# EAGLE board mpg-200-prototype_v4-duplicated-tmp (EAGLE 7.2.0)
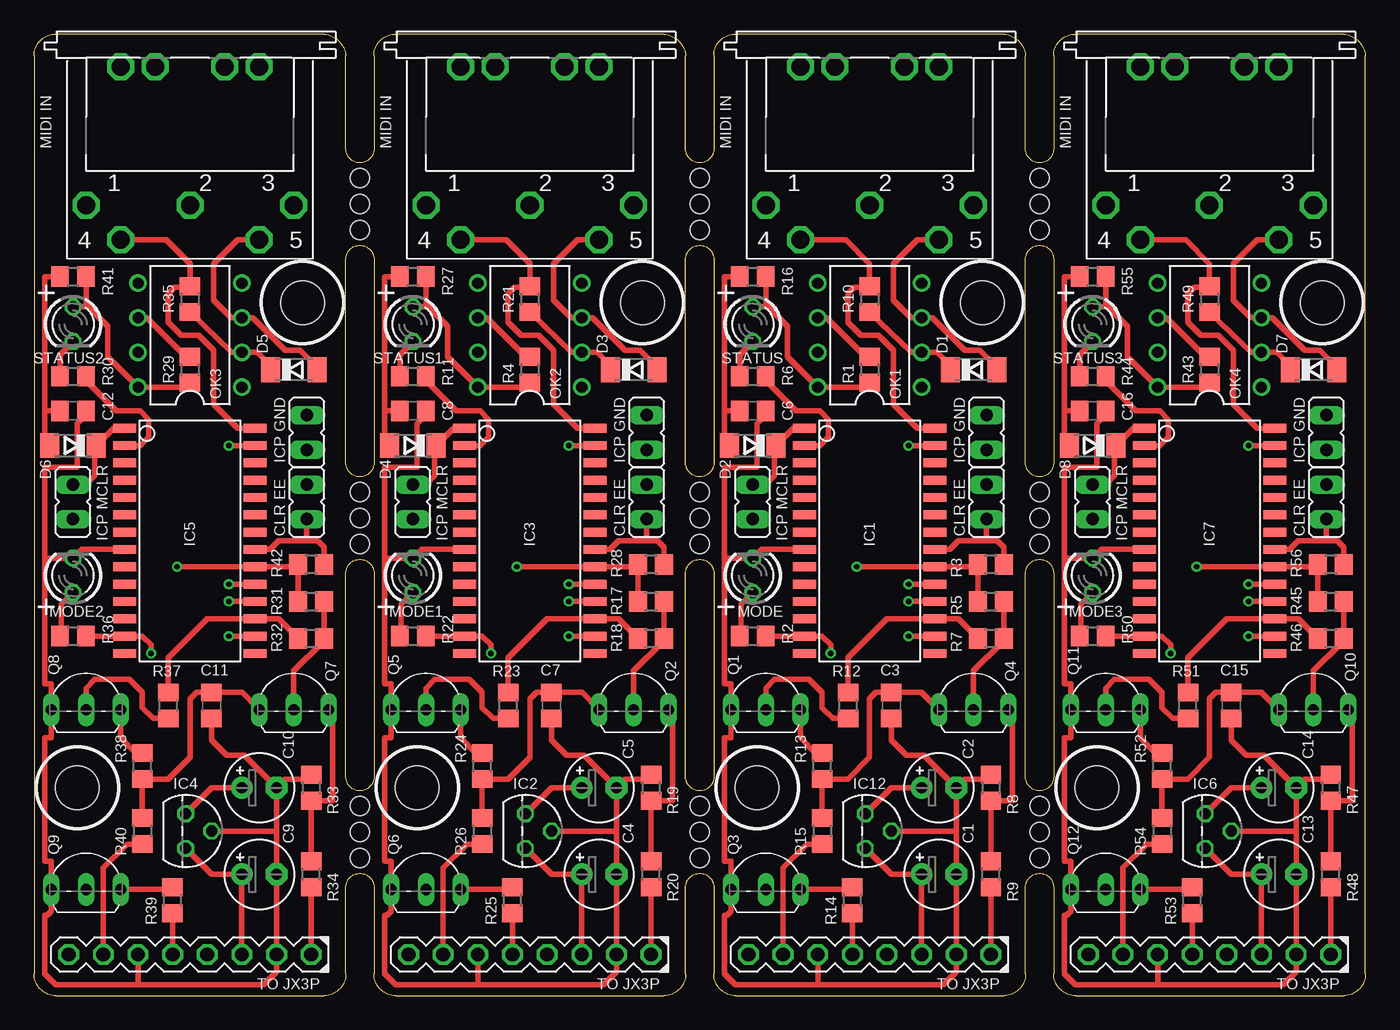
[diagram p0: board, top side]
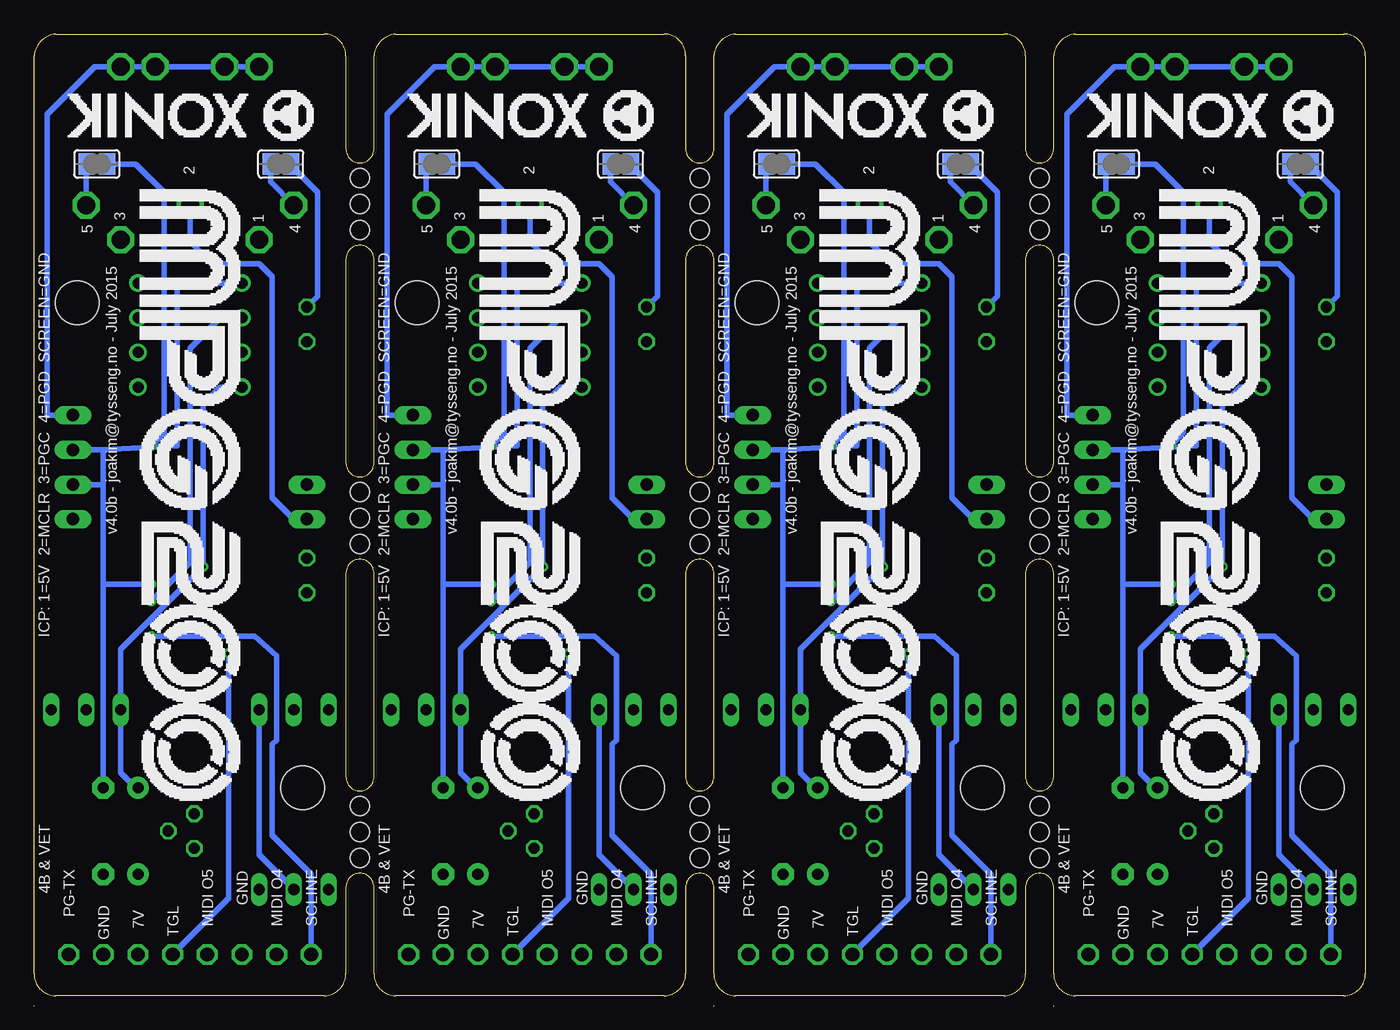
[diagram p1: board, bottom side, seen from below]

Size 97.63 x 70.48 mm. Coordinates in mm from the lower left corner, seen from the top.
Outline: 72.71,1.59 72.71,7.94 arc-180 74.77,7.94 74.77,1.59 arc90 76.36,0 96.04,0 arc90 97.63,1.59 97.63,68.9 arc80 96.04,70.48 76.36,70.48 arc90 74.77,68.9 74.77,62.07 arc-180 72.71,62.07 72.71,68.9 arc80 71.12,70.48 51.44,70.48 arc90 49.85,68.9 49.85,62.07 arc-180 47.78,62.07 47.78,68.9 arc80 46.2,70.48 26.51,70.48 arc90 24.92,68.9 24.92,62.07 arc-180 22.86,62.07 22.86,68.9 arc80 21.27,70.48 1.59,70.48 arc90 0,68.9 0,1.59 arc90 1.59,0 21.27,0 arc90 22.86,1.59 22.86,7.94 arc-180 24.92,7.94 24.92,1.59 arc90 26.51,0 46.2,0 arc90 47.78,1.59 47.78,7.94 arc-180 49.85,7.94 49.85,1.59 arc90 51.44,0 71.12,0 arc90 72.71,1.59
Outline: 72.71,16.03 72.71,30.96 arc-180 74.77,30.96 74.77,16.03 arc-180 72.71,16.03
Outline: 72.71,39.05 72.71,53.98 arc-180 74.77,53.98 74.77,39.05 arc-180 72.71,39.05
Outline: 49.85,53.98 49.85,39.05 arc-180 47.78,39.05 47.78,53.98 arc-180 49.85,53.98
Outline: 49.85,30.96 49.85,16.03 arc-180 47.78,16.03 47.78,30.96 arc-180 49.85,30.96
Outline: 24.92,53.98 24.92,39.05 arc-180 22.86,39.05 22.86,53.98 arc-180 24.92,53.98
Outline: 24.92,30.96 24.92,16.03 arc-180 22.86,16.03 22.86,30.96 arc-180 24.92,30.96
Copper layers (1*16): Top 0.0356mm / dielectric 1.5011mm / Bottom 0.0356mm
Design rules "LaenPCBOrder": minimum track width 6mil, minimum drill 13mil, track to track 6mil, track to pad 6mil, pad to pad 6mil, via to via 6mil, smd to smd 6mil, copper to edge 15mil, drill to drill 6mil, minimum pad ring 7mil, minimum via ring 7mil, stop-mask expansion 3mil, vias tented up to drill 0mil, thermal gap 10mil
Holes 3.2 mm at 69.53,50.8 53.02,15.24 44.61,50.8 28.1,15.24 19.68,50.8 3.17,15.24 94.46,50.8 77.95,15.24
Holes 1.4 mm at 23.89,13.89 23.89,11.99 23.89,10.08 48.82,13.89 48.82,11.99 48.82,10.08 73.74,13.89 73.74,11.99 73.74,10.08 23.89,36.91 23.89,35 23.89,33.1 48.82,36.91 48.82,35 48.82,33.1 73.74,36.91 73.74,35 73.74,33.1 23.89,59.93 23.89,58.02 23.89,56.12 48.82,59.93 48.82,58.02 48.82,56.12 73.74,59.93 73.74,58.02 73.74,56.12

## Footprints (pad centres in the part's own frame; a part is rotated, then mirrored left to right if it is on the bottom)
E2,5-5 = drill 0.813 pad 1.6: + -1.27,0 | drill 0.813 pad 1.6 octagon: - 1.27,0
C0805 = smd 1.3 x 1.5: 1 -0.95,0; 2 0.95,0
SOD80C = smd 1.4 x 1.8: A 1.7,0; C -1.7,0
SO28W = smd 0.65 x 1.7: 1 -7.62,-4.78; 2 -6.35,-4.78; 3 -5.08,-4.78; 4 -3.81,-4.78; 5 -2.54,-4.78; 6 -1.27,-4.78; 7 0,-4.78; 8 1.27,-4.78; 9 2.54,-4.78; 10 3.81,-4.78; 11 5.08,-4.78; 12 6.35,-4.78; 13 7.62,-4.78; 14 8.89,-4.78; 15 8.89,4.78; 16 7.62,4.78; 17 6.35,4.78; 18 5.08,4.78; 19 3.81,4.78; 20 2.54,4.78; 21 1.27,4.78; 22 0,4.78; 23 -1.27,4.78; 24 -2.54,4.78; 25 -3.81,4.78; 26 -5.08,4.78; 27 -6.35,4.78; 28 -7.62,4.78
TO92 = drill 0.813 octagon: 1 -1.27,0; 2 0,1.905; 3 1.27,0
JP1 = drill 0.914 long: 1 0,-1.27; 2 0,1.27
DIN5-180-J-DUAL-GND-SHORT = drill 1.321 octagon: 1 7.62,5.08; 2 0,5.08; 3 -7.62,5.08; 4 5.08,7.62; 5 -5.08,7.62; PE -2.54,-5.08; PE@1 5.08,-5.08; PE@2 2.54,-5.08; PE@3 -5.08,-5.08
LED3MM = drill 0.813 octagon: A -1.27,0; K 1.27,0
DIL08-J = drill 0.813 pad 1.27: 1 -3.81,-3.81; 2 -1.27,-3.81; 3 1.27,-3.81; 4 3.81,-3.81; 5 3.81,3.81; 6 1.27,3.81; 7 -1.27,3.81; 8 -3.81,3.81
TO92-EBC = drill 0.813 long: B 0,-1.27; C 2.54,-1.27; E -2.54,-1.27
R0805 = smd 1.3 x 1.5: 1 -0.95,0; 2 0.95,0
SJ = smd 1.168 x 1.6: 1 -0.762,0; 2 0.762,0
MA08-1 = drill 1.016 octagon: 1 -8.89,0; 2 -6.35,0; 3 -3.81,0; 4 -1.27,0; 5 1.27,0; 6 3.81,0; 7 6.35,0; 8 8.89,0

## Placement (x,y rotation side)
C1  22uF  [E2,5-5]  66.36,8.89 0 top
C2  10uF  [E2,5-5]  66.36,15.24 0 top
C3  100nF  [C0805]  62.87,21.27 270 top
C4  22uF  [E2,5-5]  41.43,8.89 0 top
C5  10uF  [E2,5-5]  41.43,15.24 0 top
C6  100nF  [C0805]  52.7,42.86 0 top
C7  100nF  [C0805]  37.94,21.27 270 top
C8  100nF  [C0805]  27.78,42.86 0 top
C9  22uF  [E2,5-5]  16.51,8.89 0 top
C10  10uF  [E2,5-5]  16.51,15.24 0 top
C11  100nF  [C0805]  13.02,21.27 270 top
C12  100nF  [C0805]  2.86,42.86 0 top
C13  22uF  [E2,5-5]  91.28,8.89 0 top
C14  10uF  [E2,5-5]  91.28,15.24 0 top
C15  100nF  [C0805]  87.79,21.27 270 top
C16  100nF  [C0805]  77.63,42.86 0 top
D1  [SOD80C]  68.9,45.88 0 top
D2  [SOD80C]  52.7,40.32 180 top
D3  [SOD80C]  43.97,45.88 0 top
D4  [SOD80C]  27.78,40.32 180 top
D5  [SOD80C]  19.05,45.88 0 top
D6  [SOD80C]  2.86,40.32 180 top
D7  [SOD80C]  93.82,45.88 0 top
D8  [SOD80C]  77.63,40.32 180 top
IC1  PIC18F2580-E/SO  [SO28W]  61.28,33.97 270 top
IC2  7805V  [TO92]  36.04,12.06 270 top
IC3  PIC18F2580-E/SO  [SO28W]  36.35,33.97 270 top
IC4  7805V  [TO92]  11.11,12.06 270 top
IC5  PIC18F2580-E/SO  [SO28W]  11.43,33.97 270 top
IC6  7805V  [TO92]  85.88,12.06 270 top
IC7  PIC18F2580-E/SO  [SO28W]  86.2,33.97 270 top
IC12  7805V  [TO92]  60.96,12.06 270 top
JP1  [JP1]  69.85,41.27 180 top
JP2  [JP1]  52.7,36.2 180 top
JP3  [JP1]  69.85,36.2 180 top
JP4  [JP1]  44.93,41.27 180 top
JP5  [JP1]  27.78,36.2 180 top
JP6  [JP1]  44.93,36.2 180 top
JP7  [JP1]  20,41.27 180 top
JP8  [JP1]  2.86,36.2 180 top
JP9  [JP1]  20,36.2 180 top
JP10  [JP1]  94.77,41.27 180 top
JP11  [JP1]  77.63,36.2 180 top
JP12  [JP1]  94.77,36.2 180 top
MIDI_IN  DIN5-180-J2G-S  [DIN5-180-J-DUAL-GND-SHORT]  61.28,63.02 180 top
MIDI_IN1  DIN5-180-J2G-S  [DIN5-180-J-DUAL-GND-SHORT]  36.35,63.02 180 top
MIDI_IN2  DIN5-180-J2G-S  [DIN5-180-J-DUAL-GND-SHORT]  11.43,63.02 180 top
MIDI_IN3  DIN5-180-J2G-S  [DIN5-180-J-DUAL-GND-SHORT]  86.2,63.02 180 top
MODE  [LED3MM]  52.7,30.8 90 top
MODE1  [LED3MM]  27.78,30.8 90 top
MODE2  [LED3MM]  2.86,30.8 90 top
MODE3  [LED3MM]  77.63,30.8 90 top
OK1  6N137J  [DIL08-J]  61.28,48.42 90 top
OK2  6N137J  [DIL08-J]  36.35,48.42 90 top
OK3  6N137J  [DIL08-J]  11.43,48.42 90 top
OK4  6N137J  [DIL08-J]  86.2,48.42 90 top
Q1  [TO92-EBC]  53.66,22.23 0 top
Q2  [TO92-EBC]  43.97,22.23 0 top
Q3  [TO92-EBC]  53.66,9.05 0 top
Q4  [TO92-EBC]  68.9,22.23 0 top
Q5  [TO92-EBC]  28.73,22.23 0 top
Q6  [TO92-EBC]  28.73,9.05 0 top
Q7  [TO92-EBC]  19.05,22.23 0 top
Q8  [TO92-EBC]  3.81,22.23 0 top
Q9  [TO92-EBC]  3.81,9.05 0 top
Q10  [TO92-EBC]  93.82,22.23 0 top
Q11  [TO92-EBC]  78.58,22.23 0 top
Q12  [TO92-EBC]  78.58,9.05 0 top
R1  220R  [R0805]  61.28,45.88 270 top
R2  330  [R0805]  52.7,26.35 0 top
R3  10k  [R0805]  70.17,31.59 180 top
R4  220R  [R0805]  36.35,45.88 270 top
R5  22K  [R0805]  70.17,28.89 0 top
R6  330  [R0805]  52.7,45.4 0 top
R7  22K  [R0805]  70.17,26.19 0 top
R8  4.7K  [R0805]  70.17,15.24 270 top
R9  1K  [R0805]  70.17,8.89 90 top
R10  220R  [R0805]  61.28,51.05 270 top
R11  330  [R0805]  27.78,45.4 0 top
R12  1k  [R0805]  59.69,21.27 90 top
R13  1k  [R0805]  57.78,16.83 90 top
R14  220R  [R0805]  60.01,6.99 90 top
R15  220R  [R0805]  57.78,12.06 270 top
R16  10k  [R0805]  52.7,52.7 0 top
R17  22K  [R0805]  45.24,28.89 0 top
R18  22K  [R0805]  45.24,26.19 0 top
R19  4.7K  [R0805]  45.24,15.24 270 top
R20  1K  [R0805]  45.24,8.89 90 top
R21  220R  [R0805]  36.35,51.05 270 top
R22  330  [R0805]  27.78,26.35 0 top
R23  1k  [R0805]  34.77,21.27 90 top
R24  1k  [R0805]  32.86,16.83 90 top
R25  220R  [R0805]  35.08,6.99 90 top
R26  220R  [R0805]  32.86,12.06 270 top
R27  10k  [R0805]  27.78,52.7 0 top
R28  10k  [R0805]  45.24,31.59 180 top
R29  220R  [R0805]  11.43,45.88 270 top
R30  330  [R0805]  2.86,45.4 0 top
R31  22K  [R0805]  20.32,28.89 0 top
R32  22K  [R0805]  20.32,26.19 0 top
R33  4.7K  [R0805]  20.32,15.24 270 top
R34  1K  [R0805]  20.32,8.89 90 top
R35  220R  [R0805]  11.43,51.05 270 top
R36  330  [R0805]  2.86,26.35 0 top
R37  1k  [R0805]  9.84,21.27 90 top
R38  1k  [R0805]  7.94,16.83 90 top
R39  220R  [R0805]  10.16,6.99 90 top
R40  220R  [R0805]  7.94,12.06 270 top
R41  10k  [R0805]  2.86,52.7 0 top
R42  10k  [R0805]  20.32,31.59 180 top
R43  220R  [R0805]  86.2,45.88 270 top
R44  330  [R0805]  77.63,45.4 0 top
R45  22K  [R0805]  95.09,28.89 0 top
R46  22K  [R0805]  95.09,26.19 0 top
R47  4.7K  [R0805]  95.09,15.24 270 top
R48  1K  [R0805]  95.09,8.89 90 top
R49  220R  [R0805]  86.2,51.05 270 top
R50  330  [R0805]  77.63,26.35 0 top
R51  1k  [R0805]  84.61,21.27 90 top
R52  1k  [R0805]  82.71,16.83 90 top
R53  220R  [R0805]  84.93,6.99 90 top
R54  220R  [R0805]  82.71,12.06 270 top
R55  10k  [R0805]  77.63,52.7 0 top
R56  10k  [R0805]  95.09,31.59 180 top
SJ1  [SJ]  68.1,60.96 180 bottom
SJ2  [SJ]  54.61,60.96 0 bottom
SJ3  [SJ]  43.18,60.96 180 bottom
SJ4  [SJ]  29.69,60.96 0 bottom
SJ5  [SJ]  18.26,60.96 180 bottom
SJ6  [SJ]  4.76,60.96 0 bottom
SJ7  [SJ]  93.03,60.96 180 bottom
SJ8  [SJ]  79.53,60.96 0 bottom
STATUS  [LED3MM]  52.7,49.21 270 top
STATUS1  [LED3MM]  27.78,49.21 270 top
STATUS2  [LED3MM]  2.86,49.21 270 top
STATUS3  [LED3MM]  77.63,49.21 270 top
TO_JX3P  [MA08-1]  61.28,3.02 180 top
TO_JX3P1  [MA08-1]  36.35,3.02 180 top
TO_JX3P2  [MA08-1]  11.43,3.02 180 top
TO_JX3P3  [MA08-1]  86.2,3.02 180 top

## Library data of the parts
C1 C2 C4 C5 C9 C10 C13 C14 = rcl
C3 C6-C8 C11 C12 C15 C16 R1-R56 = resistor
D1-D8 = diode
IC1 IC3 IC5 IC7 = microchip; MF: MICROCHIP; MPN: PIC18F2580-I/SO; OC_FARNELL: 9321284; OC_NEWARK: 71J7243
IC2 IC4 IC6 IC12 = linear
JP1-JP12 SJ1-SJ8 = jumper
MIDI_IN MIDI_IN1-MIDI_IN3 OK1-OK4 = joakim
MODE MODE1-MODE3 STATUS STATUS1-STATUS3 = led
Q1-Q12 = transistor-neu-to92
TO_JX3P TO_JX3P1-TO_JX3P3 = joakim; OC_FARNELL: unknown; OC_NEWARK: unknown

## Nets
7V_FROM_JX3P: C1.+ IC12.3 TO_JX3P.3
7V_FROM_JX3P1: C4.+ IC2.3 TO_JX3P1.3
7V_FROM_JX3P2: C9.+ IC4.3 TO_JX3P2.3
7V_FROM_JX3P3: C13.+ IC6.3 TO_JX3P3.3
+5V: C2.+ C3.1 IC1.20 IC12.1 OK1.8 Q4.E R1.2 R3.2 R5.1 R13.1 R15.1 R16.2 SJ2.2 STATUS.A
+5V1: C5.+ C7.1 IC2.1 IC3.20 OK2.8 Q2.E R4.2 R17.1 R24.1 R26.1 R27.2 R28.2 SJ4.2 STATUS1.A
+5V2: C10.+ C11.1 IC4.1 IC5.20 OK3.8 Q7.E R29.2 R31.1 R38.1 R40.1 R41.2 R42.2 SJ6.2 STATUS2.A
+5V3: C14.+ C15.1 IC6.1 IC7.20 OK4.8 Q10.E R43.2 R45.1 R52.1 R54.1 R55.2 R56.2 SJ8.2 STATUS3.A
CLEAREE: IC1.21 JP3.2 R3.1
CLEAREE1: IC3.21 JP6.2 R28.1
CLEAREE2: IC5.21 JP9.2 R42.1
CLEAREE3: IC7.21 JP12.2 R56.1
GND: C1.- C2.- C3.2 C6.2 IC1.8 IC1.19 IC12.2 JP1.2 JP3.1 MODE.K OK1.5 Q1.E Q3.E R8.1 TO_JX3P.2 TO_JX3P.6
GND1: C4.- C5.- C7.2 C8.2 IC2.2 IC3.8 IC3.19 JP4.2 JP6.1 MODE1.K OK2.5 Q5.E Q6.E R19.1 TO_JX3P1.2 TO_JX3P1.6
GND2: C9.- C10.- C11.2 C12.2 IC4.2 IC5.8 IC5.19 JP7.2 JP9.1 MODE2.K OK3.5 Q8.E Q9.E R33.1 TO_JX3P2.2 TO_JX3P2.6
GND3: C13.- C14.- C15.2 C16.2 IC6.2 IC7.8 IC7.19 JP10.2 JP12.1 MODE3.K OK4.5 Q11.E Q12.E R47.1 TO_JX3P3.2 TO_JX3P3.6
MCLR: D2.C IC1.1 JP2.1
MCLR1: D4.C IC3.1 JP5.1
MCLR2: D6.C IC5.1 JP8.1
MCLR3: D8.C IC7.1 JP11.1
MIDIIN1: IC3.28 MIDI_IN1.4 R21.1
MIDIIN2: D3.A MIDI_IN1.5 OK2.3
MIDIIN3: IC5.28 MIDI_IN2.4 R35.1
MIDIIN4: IC1.28 MIDI_IN.4 R10.1
MIDIIN5: D1.A MIDI_IN.5 OK1.3
MIDIIN6: D5.A MIDI_IN2.5 OK3.3
MIDIIN7: IC7.28 MIDI_IN3.4 R49.1
MIDIIN8: D7.A MIDI_IN3.5 OK4.3
MIDIOUT1: R25.1 TO_JX3P1.5
MIDIOUT2: R26.2 TO_JX3P1.7
MIDIOUT3: R39.1 TO_JX3P2.5
MIDIOUT4: R15.2 TO_JX3P.7
MIDIOUT5: R14.1 TO_JX3P.5
MIDIOUT6: R40.2 TO_JX3P2.7
MIDIOUT7: R53.1 TO_JX3P3.5
MIDIOUT8: R54.2 TO_JX3P3.7
MIDIRX: IC1.18 OK1.6 R1.1
MIDIRX1: IC3.18 OK2.6 R4.1
MIDIRX2: IC5.18 OK3.6 R29.1
MIDIRX3: IC7.18 OK4.6 R43.1
N$1: R6.1 STATUS.K
N$2: Q4.B R5.2 R7.2
N$3: MODE.A R2.1
N$4: Q1.B R12.1
N$5: D1.C OK1.2 R10.2
N$6: Q4.C R8.2 R9.2
N$7: Q1.C Q3.B R13.2
N$8: Q3.C R14.2
N$9: R9.1 TO_JX3P.1
N$10: MIDI_IN.3 SJ1.2
N$11: JP2.2 MIDI_IN.2
N$12: MIDI_IN.1 SJ2.1
N$13: JP1.1 MIDI_IN.PE MIDI_IN.PE@1 MIDI_IN.PE@2 MIDI_IN.PE@3
N$14: C6.1 D2.A R16.1
N$15: D3.C OK2.2 R21.2
N$16: Q2.B R17.2 R18.2
N$17: Q2.C R19.2 R20.2
N$18: R11.1 STATUS1.K
N$19: MODE1.A R22.1
N$20: Q5.B R23.1
N$21: Q5.C Q6.B R24.2
N$22: Q6.C R25.2
N$23: R20.1 TO_JX3P1.1
N$24: JP4.1 MIDI_IN1.PE MIDI_IN1.PE@1 MIDI_IN1.PE@2 MIDI_IN1.PE@3
N$25: MIDI_IN1.3 SJ3.2
N$26: JP5.2 MIDI_IN1.2
N$27: MIDI_IN1.1 SJ4.1
N$28: C8.1 D4.A R27.1
N$29: D5.C OK3.2 R35.2
N$30: Q7.B R31.2 R32.2
N$31: Q7.C R33.2 R34.2
N$32: R30.1 STATUS2.K
N$33: MODE2.A R36.1
N$34: Q8.B R37.1
N$35: Q8.C Q9.B R38.2
N$36: Q9.C R39.2
N$37: R34.1 TO_JX3P2.1
N$38: JP7.1 MIDI_IN2.PE MIDI_IN2.PE@1 MIDI_IN2.PE@2 MIDI_IN2.PE@3
N$39: MIDI_IN2.3 SJ5.2
N$40: JP8.2 MIDI_IN2.2
N$41: MIDI_IN2.1 SJ6.1
N$42: C12.1 D6.A R41.1
N$43: D7.C OK4.2 R49.2
N$44: Q10.B R45.2 R46.2
N$45: Q10.C R47.2 R48.2
N$46: R44.1 STATUS3.K
N$47: MODE3.A R50.1
N$48: Q11.B R51.1
N$49: Q11.C Q12.B R52.2
N$50: Q12.C R53.2
N$51: R48.1 TO_JX3P3.1
N$52: JP10.1 MIDI_IN3.PE MIDI_IN3.PE@1 MIDI_IN3.PE@2 MIDI_IN3.PE@3
N$53: MIDI_IN3.3 SJ7.2
N$54: JP11.2 MIDI_IN3.2
N$55: MIDI_IN3.1 SJ8.1
N$56: C16.1 D8.A R55.1
PGCLOCK: IC1.27 SJ1.1
PGCLOCK1: IC3.27 SJ3.1
PGCLOCK2: IC5.27 SJ5.1
PGCLOCK3: IC7.27 SJ7.1
SCANLINE: IC1.16 TO_JX3P.8
SCANLINE1: IC3.16 TO_JX3P1.8
SCANLINE2: IC5.16 TO_JX3P2.8
SCANLINE3: IC7.16 TO_JX3P3.8
STATUSLED: IC1.2 R6.2
STATUSLED1: IC3.2 R11.2
STATUSLED2: IC5.2 R30.2
STATUSLED3: IC7.2 R44.2
TOGGLE: IC1.13 R2.2 TO_JX3P.4
TOGGLE1: IC3.13 R22.2 TO_JX3P1.4
TOGGLE2: IC5.13 R36.2 TO_JX3P2.4
TOGGLE3: IC7.13 R50.2 TO_JX3P3.4
TX: IC1.17 R7.1 R12.2
TX1: IC3.17 R18.1 R23.2
TX2: IC5.17 R32.1 R37.2
TX3: IC7.17 R46.1 R51.2

## Tracks (layer width: path | path; a pad name or v marks a point on that pad's centre or on a via)
7V_FROM_JX3P
  Top 0.406: IC12.3 62.87,8.89 C1.+ TO_JX3P.3
7V_FROM_JX3P1
  Top 0.406: IC2.3 37.94,8.89 C4.+ TO_JX3P1.3
7V_FROM_JX3P2
  Top 0.406: IC4.3 13.02,8.89 C9.+ TO_JX3P2.3
7V_FROM_JX3P3
  Top 0.406: IC6.3 87.79,8.89 C13.+ TO_JX3P3.3
+5V  (via drill 0.38)
  Top 0.406: R1.2 60.96,44.61 OK1.8 55.24,46.83 55.24,49.05 53.82,50.48 | STATUS.A 53.82,50.48 | R13.1 57.78,15.72 | 57.78,13.34 57.78,13.18 | 57.78,13.18 57.94,13.34 57.78,13.34 | v60.33,31.43 IC1.20 69.06,31.43 R3.2 R5.1 | 57.78,13.18 R15.1 | Q4.E 65.09,22.22 C3.1 62.07,22.23 61.75,22.23 61.28,21.75 61.28,17.46 59.69,15.88 57.94,15.88 57.78,15.72 | IC12.1 62.87,15.24 C2.+ | 57.78,13.34 57.78,15.72 | R16.2 53.66,50.64 53.82,50.48
  Bottom 0.406: OK1.8 59.05,44.61 60.33,43.34 v60.33,31.43 66.36,25.4 Q4.E 66.36,16.35 65.25,15.24 C2.+ | SJ2.2 53.85,60.83 51.91,58.9 51.91,51.28 STATUS.A
+5V1  (via drill 0.38)
  Top 0.406: R4.2 36.04,44.61 OK2.8 30.32,46.83 30.32,49.05 28.89,50.48 | STATUS1.A 28.89,50.48 | R24.1 32.86,15.72 | 32.86,13.34 32.86,13.18 | 32.86,13.18 33.02,13.34 32.86,13.34 | v35.4,31.43 IC3.20 44.13,31.43 R28.2 R17.1 | 32.86,13.18 R26.1 | Q2.E 40.17,22.22 C7.1 37.15,22.23 36.83,22.23 36.35,21.75 36.35,17.46 34.77,15.88 33.02,15.88 32.86,15.72 | IC2.1 37.94,15.24 C5.+ | 32.86,13.34 32.86,15.72 | R27.2 28.73,50.64 28.89,50.48
  Bottom 0.406: OK2.8 34.13,44.61 35.4,43.34 v35.4,31.43 41.43,25.4 Q2.E 41.43,16.35 40.32,15.24 C5.+ | SJ4.2 28.92,60.83 26.99,58.9 26.99,51.28 STATUS1.A
+5V2  (via drill 0.38)
  Top 0.406: R29.2 11.11,44.61 OK3.8 5.4,46.83 5.4,49.05 3.97,50.48 | STATUS2.A 3.97,50.48 | R38.1 7.94,15.72 | 7.94,13.34 7.94,13.18 | 7.94,13.18 8.1,13.34 7.94,13.34 | v10.48,31.43 IC5.20 19.21,31.43 R42.2 R31.1 | 7.94,13.18 R40.1 | Q7.E 15.24,22.22 C11.1 12.23,22.23 11.91,22.23 11.43,21.75 11.43,17.46 9.84,15.88 8.1,15.88 7.94,15.72 | IC4.1 13.02,15.24 C10.+ | 7.94,13.34 7.94,15.72 | R41.2 3.81,50.64 3.97,50.48
  Bottom 0.406: OK3.8 9.21,44.61 10.48,43.34 v10.48,31.43 16.51,25.4 Q7.E 16.51,16.35 15.4,15.24 C10.+ | SJ6.2 4,60.83 2.06,58.9 2.06,51.28 STATUS2.A
+5V3  (via drill 0.38)
  Top 0.406: R43.2 85.88,44.61 OK4.8 80.17,46.83 80.17,49.05 78.74,50.48 | STATUS3.A 78.74,50.48 | R52.1 82.71,15.72 | 82.71,13.34 82.71,13.18 | 82.71,13.18 82.87,13.34 82.71,13.34 | v85.25,31.43 IC7.20 93.98,31.43 R56.2 R45.1 | 82.71,13.18 R54.1 | Q10.E 90.01,22.22 C15.1 87,22.23 86.68,22.23 86.2,21.75 86.2,17.46 84.61,15.88 82.87,15.88 82.71,15.72 | IC6.1 87.79,15.24 C14.+ | 82.71,13.34 82.71,15.72 | R55.2 78.58,50.64 78.74,50.48
  Bottom 0.406: OK4.8 83.98,44.61 85.25,43.34 v85.25,31.43 91.28,25.4 Q10.E 91.28,16.35 90.17,15.24 C14.+ | SJ8.2 78.77,60.83 76.83,58.9 76.83,51.28 STATUS3.A
CLEAREE
  Top 0.406: IC1.21 67.15,32.7 67.79,33.34 69.85,33.34 | 69.85,33.34 70.64,33.34 71.12,32.86 R3.1 | JP3.2 69.85,33.34
CLEAREE1
  Top 0.406: IC3.21 42.23,32.7 42.86,33.34 44.93,33.34 | 44.93,33.34 45.72,33.34 46.2,32.86 R28.1 | JP6.2 44.93,33.34
CLEAREE2
  Top 0.406: IC5.21 17.3,32.7 17.94,33.34 20,33.34 | 20,33.34 20.8,33.34 21.27,32.86 R42.1 | JP9.2 20,33.34
CLEAREE3
  Top 0.406: IC7.21 92.08,32.7 92.71,33.34 94.77,33.34 | 94.77,33.34 95.57,33.34 96.04,32.86 R56.1 | JP12.2 94.77,33.34
GND  (via drill 0.38)
  Top 0.406: R8.1 70.17,15.88 68.26,15.88 C2.- | IC12.2 67.63,12.06 | 67.63,12.06 C1.- TO_JX3P.2 67.63,1.75 66.67,0.79 57.47,0.79 | 67.63,12.06 C2.- | 57.47,0.79 51.44,0.79 50.64,1.59 50.64,5.87 50.8,5.87 51.12,6.19 Q3.E 51.12,9.84 50.64,9.84 50.64,18.89 51.12,18.89 Q1.E 51.12,22.86 50.64,22.86 50.64,32.07 | TO_JX3P.6 57.47,0.79 | IC1.19 v64.14,30.16 | C6.2 53.55,42.44 53.02,41.91 53.02,38.73 50.64,38.73 50.64,32.07 | IC1.8 53.34,32.7 MODE.K 50.64,32.07 | C2.- 65.25,17.62 63.98,17.62 62.87,18.73 C3.2
  Bottom 0.406: v64.14,30.16 67.63,30.16 | 67.63,30.16 C2.- | 67.63,30.16 67.63,37.47 | 67.63,37.47 67.63,40.01 | 67.63,40.01 JP1.2 | OK1.5 62.23,52.23 62.23,40.32 67.63,40.01 | JP3.1 67.63,37.47
GND1  (via drill 0.38)
  Top 0.406: R19.1 45.24,15.88 43.34,15.88 C5.- | IC2.2 42.7,12.06 | 42.7,12.06 C4.- TO_JX3P1.2 42.7,1.75 41.75,0.79 32.54,0.79 | 42.7,12.06 C5.- | 32.54,0.79 26.51,0.79 25.72,1.59 25.72,5.87 25.88,5.87 26.19,6.19 Q6.E 26.19,9.84 25.72,9.84 25.72,18.89 26.19,18.89 Q5.E 26.19,22.86 25.72,22.86 25.72,32.07 | TO_JX3P1.6 32.54,0.79 | IC3.19 v39.21,30.16 | C8.2 28.63,42.44 28.1,41.91 28.1,38.73 25.72,38.73 25.72,32.07 | IC3.8 28.42,32.7 MODE1.K 25.72,32.07 | C5.- 40.32,17.62 39.05,17.62 37.94,18.73 C7.2
  Bottom 0.406: v39.21,30.16 42.7,30.16 | 42.7,30.16 C5.- | 42.7,30.16 42.7,37.47 | 42.7,37.47 42.7,40.01 | 42.7,40.01 JP4.2 | OK2.5 37.31,52.23 37.31,40.32 42.7,40.01 | JP6.1 42.7,37.47
GND2  (via drill 0.38)
  Top 0.406: R33.1 20.32,15.88 18.41,15.88 C10.- | IC4.2 17.78,12.06 | 17.78,12.06 C9.- TO_JX3P2.2 17.78,1.75 16.83,0.79 7.62,0.79 | 17.78,12.06 C10.- | 7.62,0.79 1.59,0.79 0.79,1.59 0.79,5.87 0.95,5.87 1.27,6.19 Q9.E 1.27,9.84 0.79,9.84 0.79,18.89 1.27,18.89 Q8.E 1.27,22.86 0.79,22.86 0.79,32.07 | TO_JX3P2.6 7.62,0.79 | IC5.19 v14.29,30.16 | C12.2 3.71,42.44 3.17,41.91 3.17,38.73 0.79,38.73 0.79,32.07 | IC5.8 3.49,32.7 MODE2.K 0.79,32.07 | C10.- 15.4,17.62 14.13,17.62 13.02,18.73 C11.2
  Bottom 0.406: v14.29,30.16 17.78,30.16 | 17.78,30.16 C10.- | 17.78,30.16 17.78,37.47 | 17.78,37.47 17.78,40.01 | 17.78,40.01 JP7.2 | OK3.5 12.38,52.23 12.38,40.32 17.78,40.01 | JP9.1 17.78,37.47
GND3  (via drill 0.38)
  Top 0.406: R47.1 95.09,15.88 93.19,15.88 C14.- | IC6.2 92.55,12.06 | 92.55,12.06 C13.- TO_JX3P3.2 92.55,1.75 91.6,0.79 82.39,0.79 | 92.55,12.06 C14.- | 82.39,0.79 76.36,0.79 75.56,1.59 75.56,5.87 75.72,5.87 76.04,6.19 Q12.E 76.04,9.84 75.56,9.84 75.56,18.89 76.04,18.89 Q11.E 76.04,22.86 75.56,22.86 75.56,32.07 | TO_JX3P3.6 82.39,0.79 | IC7.19 v89.06,30.16 | C16.2 78.48,42.44 77.95,41.91 77.95,38.73 75.56,38.73 75.56,32.07 | IC7.8 78.26,32.7 MODE3.K 75.56,32.07 | C14.- 90.17,17.62 88.9,17.62 87.79,18.73 C15.2
  Bottom 0.406: v89.06,30.16 92.55,30.16 | 92.55,30.16 C14.- | 92.55,30.16 92.55,37.47 | 92.55,37.47 92.55,40.01 | 92.55,40.01 JP10.2 | OK4.5 87.15,52.23 87.15,40.32 92.55,40.01 | JP12.1 92.55,37.47
MCLR
  Top 0.406: JP2.1 53.66,37.47 54.29,38.1 54.29,40.21 D2.C 55.67,41.59 IC1.1
MCLR1
  Top 0.406: JP5.1 28.73,37.47 29.37,38.1 29.37,40.21 D4.C 30.75,41.59 IC3.1
MCLR2
  Top 0.406: JP8.1 3.81,37.47 4.45,38.1 4.45,40.21 D6.C 5.83,41.59 IC5.1
MCLR3
  Top 0.406: JP11.1 78.58,37.47 79.22,38.1 79.22,40.21 D8.C 80.6,41.59 IC7.1
MIDIIN1
  Top 0.406: MIDI_IN1.4 34.61,55.4 36.35,53.66 R21.1 36.35,51.91 35.24,51.91 34.77,51.44 34.77,49.37 35.72,48.42 36.99,48.42 38.1,47.31 38.1,43.34 39.85,41.59 IC3.28
MIDIIN2
  Top 0.406: MIDI_IN1.5 39.85,55.4 38.1,53.66 38.1,50.96 39.37,49.69 OK2.3 40.96,49.69 43.34,47.31 44.45,47.31 45.67,46.08 D3.A
MIDIIN3
  Top 0.406: MIDI_IN2.4 9.68,55.4 11.43,53.66 R35.1 11.42,51.91 10.32,51.91 9.84,51.44 9.84,49.37 10.79,48.42 12.06,48.42 13.18,47.31 13.18,43.34 14.92,41.59 IC5.28
MIDIIN4
  Top 0.406: MIDI_IN.4 59.53,55.4 61.28,53.66 R10.1 61.27,51.91 60.17,51.91 59.69,51.44 59.69,49.37 60.64,48.42 61.91,48.42 63.02,47.31 63.02,43.34 64.77,41.59 IC1.28
MIDIIN5
  Top 0.406: MIDI_IN.5 64.77,55.4 63.02,53.66 63.02,50.96 64.29,49.69 OK1.3 65.88,49.69 68.26,47.31 69.37,47.31 70.6,46.08 D1.A
MIDIIN6
  Top 0.406: MIDI_IN2.5 14.92,55.4 13.18,53.66 13.18,50.96 14.45,49.69 OK3.3 16.03,49.69 18.41,47.31 19.53,47.31 20.75,46.08 D5.A
MIDIIN7
  Top 0.406: MIDI_IN3.4 84.45,55.4 86.2,53.66 R49.1 86.19,51.91 85.09,51.91 84.61,51.44 84.61,49.37 85.57,48.42 86.84,48.42 87.95,47.31 87.95,43.34 89.69,41.59 IC7.28
MIDIIN8
  Top 0.406: MIDI_IN3.5 89.69,55.4 87.95,53.66 87.95,50.96 89.22,49.69 OK4.3 90.81,49.69 93.19,47.31 94.3,47.31 95.52,46.08 D7.A
MIDIOUT1
  Top 0.406: TO_JX3P1.5 R25.1
MIDIOUT2
  Top 0.406: TO_JX3P1.7 30,9.37 31.75,11.11 R26.2
MIDIOUT3
  Top 0.406: TO_JX3P2.5 R39.1
MIDIOUT4
  Top 0.406: TO_JX3P.7 54.93,9.37 56.67,11.11 R15.2
MIDIOUT5
  Top 0.406: TO_JX3P.5 R14.1
MIDIOUT6
  Top 0.406: TO_JX3P2.7 5.08,9.37 6.83,11.11 R40.2
MIDIOUT7
  Top 0.406: TO_JX3P3.5 R53.1
MIDIOUT8
  Top 0.406: TO_JX3P3.7 79.85,9.37 81.6,11.11 R54.2
MIDIRX  (via drill 0.38)
  Top 0.406: R1.1 61.06,46.73 58.1,49.69 OK1.6 | IC1.18 v64.14,28.89
  Bottom 0.406: v64.14,28.89 61.28,31.75 61.28,47.47 59.05,49.69 OK1.6
MIDIRX1  (via drill 0.38)
  Top 0.406: R4.1 36.14,46.73 33.18,49.69 OK2.6 | IC3.18 v39.21,28.89
  Bottom 0.406: v39.21,28.89 36.35,31.75 36.35,47.47 34.13,49.69 OK2.6
MIDIRX2  (via drill 0.38)
  Top 0.406: R29.1 11.21,46.73 8.26,49.69 OK3.6 | IC5.18 v14.29,28.89
  Bottom 0.406: v14.29,28.89 11.43,31.75 11.43,47.47 9.21,49.69 OK3.6
MIDIRX3  (via drill 0.38)
  Top 0.406: R43.1 85.99,46.73 83.03,49.69 OK4.6 | IC7.18 v89.06,28.89
  Bottom 0.406: v89.06,28.89 86.2,31.75 86.2,47.47 83.98,49.69 OK4.6
N$1
  Top 0.406: R6.1 51.76,46.99 STATUS.K
N$2
  Top 0.406: Q4.B 68.9,23.81 70.96,25.88 70.96,26.04 R7.2 R5.2
N$3
  Top 0.406: MODE.A 51.85,28.68 51.85,26.45 R2.1
N$4
  Top 0.406: R12.1 58.58,20.32 57.78,21.11 57.78,22.23 56.83,23.18 54.29,23.18 53.66,22.54 Q1.B
N$5
  Top 0.406: R10.2 64.33,47.15 OK1.2 66.2,47.15 67.2,46.15 D1.C
N$6
  Top 0.406: Q4.C 71.75,20.95 71.75,14.29 70.27,14.29 R8.2 R9.2
N$7
  Top 0.406: R13.2 57.31,17.78 56.2,18.89 Q1.C
  Bottom 0.406: Q1.C 56.2,10.32 Q3.B
N$8
  Top 0.406: Q3.C 60.43,7.78 R14.2
N$9
  Top 0.406: TO_JX3P.1 R9.1
N$10
  Bottom 0.406: MIDI_IN.3 68.9,60.93 SJ1.2
N$11
  Bottom 0.406: MIDI_IN.2 61.28,55.24 59.69,53.66 56.2,53.66 55.24,52.7 55.24,36.51 53.66,34.92 JP2.2
N$12
  Bottom 0.406: SJ2.1 55.37,59.66 MIDI_IN.1
N$13
  Bottom 0.406: JP1.1 71.75,42.55 71.75,64.61 68.26,68.1 MIDI_IN.PE@1
N$14
  Top 0.406: R16.1 50.64,52.7 50.64,42.86 | 50.64,42.86 50.64,40.37 D2.A | C6.1 50.64,42.86
N$15
  Top 0.406: R21.2 39.41,47.15 OK2.2 41.27,47.15 42.27,46.15 D3.C
N$16
  Top 0.406: Q2.B 43.97,23.81 46.04,25.88 46.04,26.04 R18.2 R17.2
N$17
  Top 0.406: Q2.C 46.83,20.95 46.83,14.29 45.35,14.29 R19.2 R20.2
N$18
  Top 0.406: R11.1 26.83,46.99 STATUS1.K
N$19
  Top 0.406: MODE1.A 26.93,28.68 26.93,26.45 R22.1
N$20
  Top 0.406: R23.1 33.65,20.32 32.86,21.11 32.86,22.23 31.91,23.18 29.37,23.18 28.73,22.54 Q5.B
N$21
  Top 0.406: R24.2 32.39,17.78 31.27,18.89 Q5.C
  Bottom 0.406: Q5.C 31.27,10.32 Q6.B
N$22
  Top 0.406: Q6.C 35.5,7.78 R25.2
N$23
  Top 0.406: TO_JX3P1.1 R20.1
N$24
  Bottom 0.406: JP4.1 46.83,42.55 46.83,64.61 43.34,68.1 MIDI_IN1.PE@1
N$25
  Bottom 0.406: MIDI_IN1.3 43.97,60.93 SJ3.2
N$26
  Bottom 0.406: MIDI_IN1.2 36.35,55.24 34.77,53.66 31.27,53.66 30.32,52.7 30.32,36.51 28.73,34.92 JP5.2
N$27
  Bottom 0.406: SJ4.1 30.45,59.66 MIDI_IN1.1
N$28
  Top 0.406: R27.1 25.72,52.7 25.72,42.86 | 25.72,42.86 25.72,40.37 D4.A | C8.1 25.72,42.86
N$29
  Top 0.406: R35.2 14.48,47.15 OK3.2 16.35,47.15 17.35,46.15 D5.C
N$30
  Top 0.406: Q7.B 19.05,23.81 21.11,25.88 21.11,26.04 R32.2 R31.2
N$31
  Top 0.406: Q7.C 21.91,20.95 21.91,14.29 20.42,14.29 R33.2 R34.2
N$32
  Top 0.406: R30.1 1.91,46.99 STATUS2.K
N$33
  Top 0.406: MODE2.A 2.01,28.68 2.01,26.45 R36.1
N$34
  Top 0.406: R37.1 8.73,20.32 7.94,21.11 7.94,22.23 6.99,23.18 4.45,23.18 3.81,22.54 Q8.B
N$35
  Top 0.406: R38.2 7.46,17.78 6.35,18.89 Q8.C
  Bottom 0.406: Q8.C 6.35,10.32 Q9.B
N$36
  Top 0.406: Q9.C 10.58,7.78 R39.2
N$37
  Top 0.406: TO_JX3P2.1 R34.1
N$38
  Bottom 0.406: JP7.1 21.91,42.55 21.91,64.61 18.41,68.1 MIDI_IN2.PE@1
N$39
  Bottom 0.406: MIDI_IN2.3 19.05,60.93 SJ5.2
N$40
  Bottom 0.406: MIDI_IN2.2 11.43,55.24 9.84,53.66 6.35,53.66 5.4,52.7 5.4,36.51 3.81,34.92 JP8.2
N$41
  Bottom 0.406: SJ6.1 5.52,59.66 MIDI_IN2.1
N$42
  Top 0.406: R41.1 0.79,52.7 0.79,42.86 | 0.79,42.86 0.79,40.37 D6.A | C12.1 0.79,42.86
N$43
  Top 0.406: R49.2 89.26,47.15 OK4.2 91.12,47.15 92.12,46.15 D7.C
N$44
  Top 0.406: Q10.B 93.82,23.81 95.89,25.88 95.89,26.04 R46.2 R45.2
N$45
  Top 0.406: Q10.C 96.68,20.95 96.68,14.29 95.19,14.29 R47.2 R48.2
N$46
  Top 0.406: R44.1 76.68,46.99 STATUS3.K
N$47
  Top 0.406: MODE3.A 76.78,28.68 76.78,26.45 R50.1
N$48
  Top 0.406: R51.1 83.5,20.32 82.71,21.11 82.71,22.23 81.76,23.18 79.22,23.18 78.58,22.54 Q11.B
N$49
  Top 0.406: R52.2 82.23,17.78 81.12,18.89 Q11.C
  Bottom 0.406: Q11.C 81.12,10.32 Q12.B
N$50
  Top 0.406: Q12.C 85.35,7.78 R53.2
N$51
  Top 0.406: TO_JX3P3.1 R48.1
N$52
  Bottom 0.406: JP10.1 96.68,42.55 96.68,64.61 93.19,68.1 MIDI_IN3.PE@1
N$53
  Bottom 0.406: MIDI_IN3.3 93.82,60.93 SJ7.2
N$54
  Bottom 0.406: MIDI_IN3.2 86.2,55.24 84.61,53.66 81.12,53.66 80.17,52.7 80.17,36.51 78.58,34.92 JP11.2
N$55
  Bottom 0.406: SJ8.1 80.3,59.66 MIDI_IN3.1
N$56
  Top 0.406: R55.1 75.56,52.7 75.56,42.86 | 75.56,42.86 75.56,40.37 D8.A | C16.1 75.56,42.86
PGCLOCK  (via drill 0.38)
  Top 0.406: v64.14,40.32 IC1.27
  Bottom 0.406: SJ1.1 65.25,60.96 63.18,58.9 63.18,41.27 v64.14,40.32
PGCLOCK1  (via drill 0.38)
  Top 0.406: v39.21,40.32 IC3.27
  Bottom 0.406: SJ3.1 40.32,60.96 38.26,58.9 38.26,41.27 v39.21,40.32
PGCLOCK2  (via drill 0.38)
  Top 0.406: v14.29,40.32 IC5.27
  Bottom 0.406: SJ5.1 15.4,60.96 13.34,58.9 13.34,41.27 v14.29,40.32
PGCLOCK3  (via drill 0.38)
  Top 0.406: v89.06,40.32 IC7.27
  Bottom 0.406: SJ7.1 90.17,60.96 88.11,58.9 88.11,41.27 v89.06,40.32
SCANLINE  (via drill 0.38)
  Top 0.406: v64.14,26.35 IC1.16
  Bottom 0.406: TO_JX3P.8 52.39,8.89 55.24,11.75 55.24,18.41 54.93,18.73 54.93,24.92 56.52,26.35 v64.14,26.35
SCANLINE1  (via drill 0.38)
  Top 0.406: v39.21,26.35 IC3.16
  Bottom 0.406: TO_JX3P1.8 27.46,8.89 30.32,11.75 30.32,18.41 30,18.73 30,24.92 31.59,26.35 v39.21,26.35
SCANLINE2  (via drill 0.38)
  Top 0.406: v14.29,26.35 IC5.16
  Bottom 0.406: TO_JX3P2.8 2.54,8.89 5.4,11.75 5.4,18.41 5.08,18.73 5.08,24.92 6.67,26.35 v14.29,26.35
SCANLINE3  (via drill 0.38)
  Top 0.406: v89.06,26.35 IC7.16
  Bottom 0.406: TO_JX3P3.8 77.31,8.89 80.17,11.75 80.17,18.41 79.85,18.73 79.85,24.92 81.44,26.35 v89.06,26.35
STATUSLED
  Top 0.406: IC1.2 57.63,40.32 58.26,40.96 58.26,42.23 57.63,42.86 55.88,42.86 53.5,45.24 R6.2
STATUSLED1
  Top 0.406: IC3.2 32.7,40.32 33.34,40.96 33.34,42.23 32.7,42.86 30.96,42.86 28.57,45.24 R11.2
STATUSLED2
  Top 0.406: IC5.2 7.78,40.32 8.41,40.96 8.41,42.23 7.78,42.86 6.03,42.86 3.65,45.24 R30.2
STATUSLED3
  Top 0.406: IC7.2 82.55,40.32 83.19,40.96 83.19,42.23 82.55,42.86 80.8,42.86 78.42,45.24 R44.2
TOGGLE  (via drill 0.38)
  Top 0.406: v58.42,25.08 58.42,25.72 57.78,26.35 IC1.13 R2.2
  Bottom 0.406: TO_JX3P.4 58.42,7.14 v58.42,25.08
TOGGLE1  (via drill 0.38)
  Top 0.406: v33.5,25.08 33.5,25.72 32.86,26.35 IC3.13 R22.2
  Bottom 0.406: TO_JX3P1.4 33.5,7.14 v33.5,25.08
TOGGLE2  (via drill 0.38)
  Top 0.406: v8.57,25.08 8.57,25.72 7.94,26.35 IC5.13 R36.2
  Bottom 0.406: TO_JX3P2.4 8.57,7.14 v8.57,25.08
TOGGLE3  (via drill 0.38)
  Top 0.406: v83.34,25.08 83.34,25.72 82.71,26.35 IC7.13 R50.2
  Bottom 0.406: TO_JX3P3.4 83.34,7.14 v83.34,25.08
TX
  Top 0.406: R12.2 59.69,24.77 62.55,27.62 IC1.17 67.79,27.62 R7.1
TX1
  Top 0.406: R23.2 34.77,24.77 37.62,27.62 IC3.17 42.86,27.62 R18.1
TX2
  Top 0.406: R37.2 9.84,24.77 12.7,27.62 IC5.17 17.94,27.62 R32.1
TX3
  Top 0.406: R51.2 84.61,24.77 87.47,27.62 IC7.17 92.71,27.62 R46.1

## Text on the board
tPlace: + | + | + | + | + | + | + | +
tNames: MIDI IN | MIDI IN | MIDI IN | MIDI IN | ICP GND | ICP GND | ICP GND | ICP GND | CLR EE | CLR EE | CLR EE | CLR EE | ICP MCLR | ICP MCLR | ICP MCLR | ICP MCLR | TO JX3P | TO JX3P | TO JX3P | TO JX3P
bNames: 2 | 2 | 2 | 2 | 4 | 1 | 3 | 5 | 4 | 1 | 3 | 5 | 4 | 1 | 3 | 5 | 4 | 1 | 3 | 5 | ICP: 1=5V 2=MCLR 3=PGC 4=PGD SCREEN=GND | ICP: 1=5V 2=MCLR 3=PGC 4=PGD SCREEN=GND | ICP: 1=5V 2=MCLR 3=PGC 4=PGD SCREEN=GND | ICP: 1=5V 2=MCLR 3=PGC 4=PGD SCREEN=GND | v4.0b - joakim@tysseng.no - July 2015 | v4.0b - joakim@tysseng.no - July 2015 | v4.0b - joakim@tysseng.no - July 2015 | v4.0b - joakim@tysseng.no - July 2015 | 4B & VET | 4B & VET | 4B & VET | 4B & VET | SCLINE | MIDI O4 | GND | MIDI O5 | PG-TX | SCLINE | MIDI O4 | GND | MIDI O5 | PG-TX | SCLINE | MIDI O4 | GND | MIDI O5 | PG-TX | SCLINE | MIDI O4 | GND | MIDI O5 | PG-TX | TGL | GND | TGL | GND | TGL | GND | TGL | GND | 7V | 7V | 7V | 7V